# Altium PCB cybd18SV1.2.3F.PcbDoc
Units mil, origin at the board's own origin, x right, y up, seen from the top; angles counter-clockwise.
Board outline 2105.38 x 2630.03 mil, 2 copper layers (Top Layer, Bottom Layer); 74 components, 61 nets, 284 pads, 43 vias.
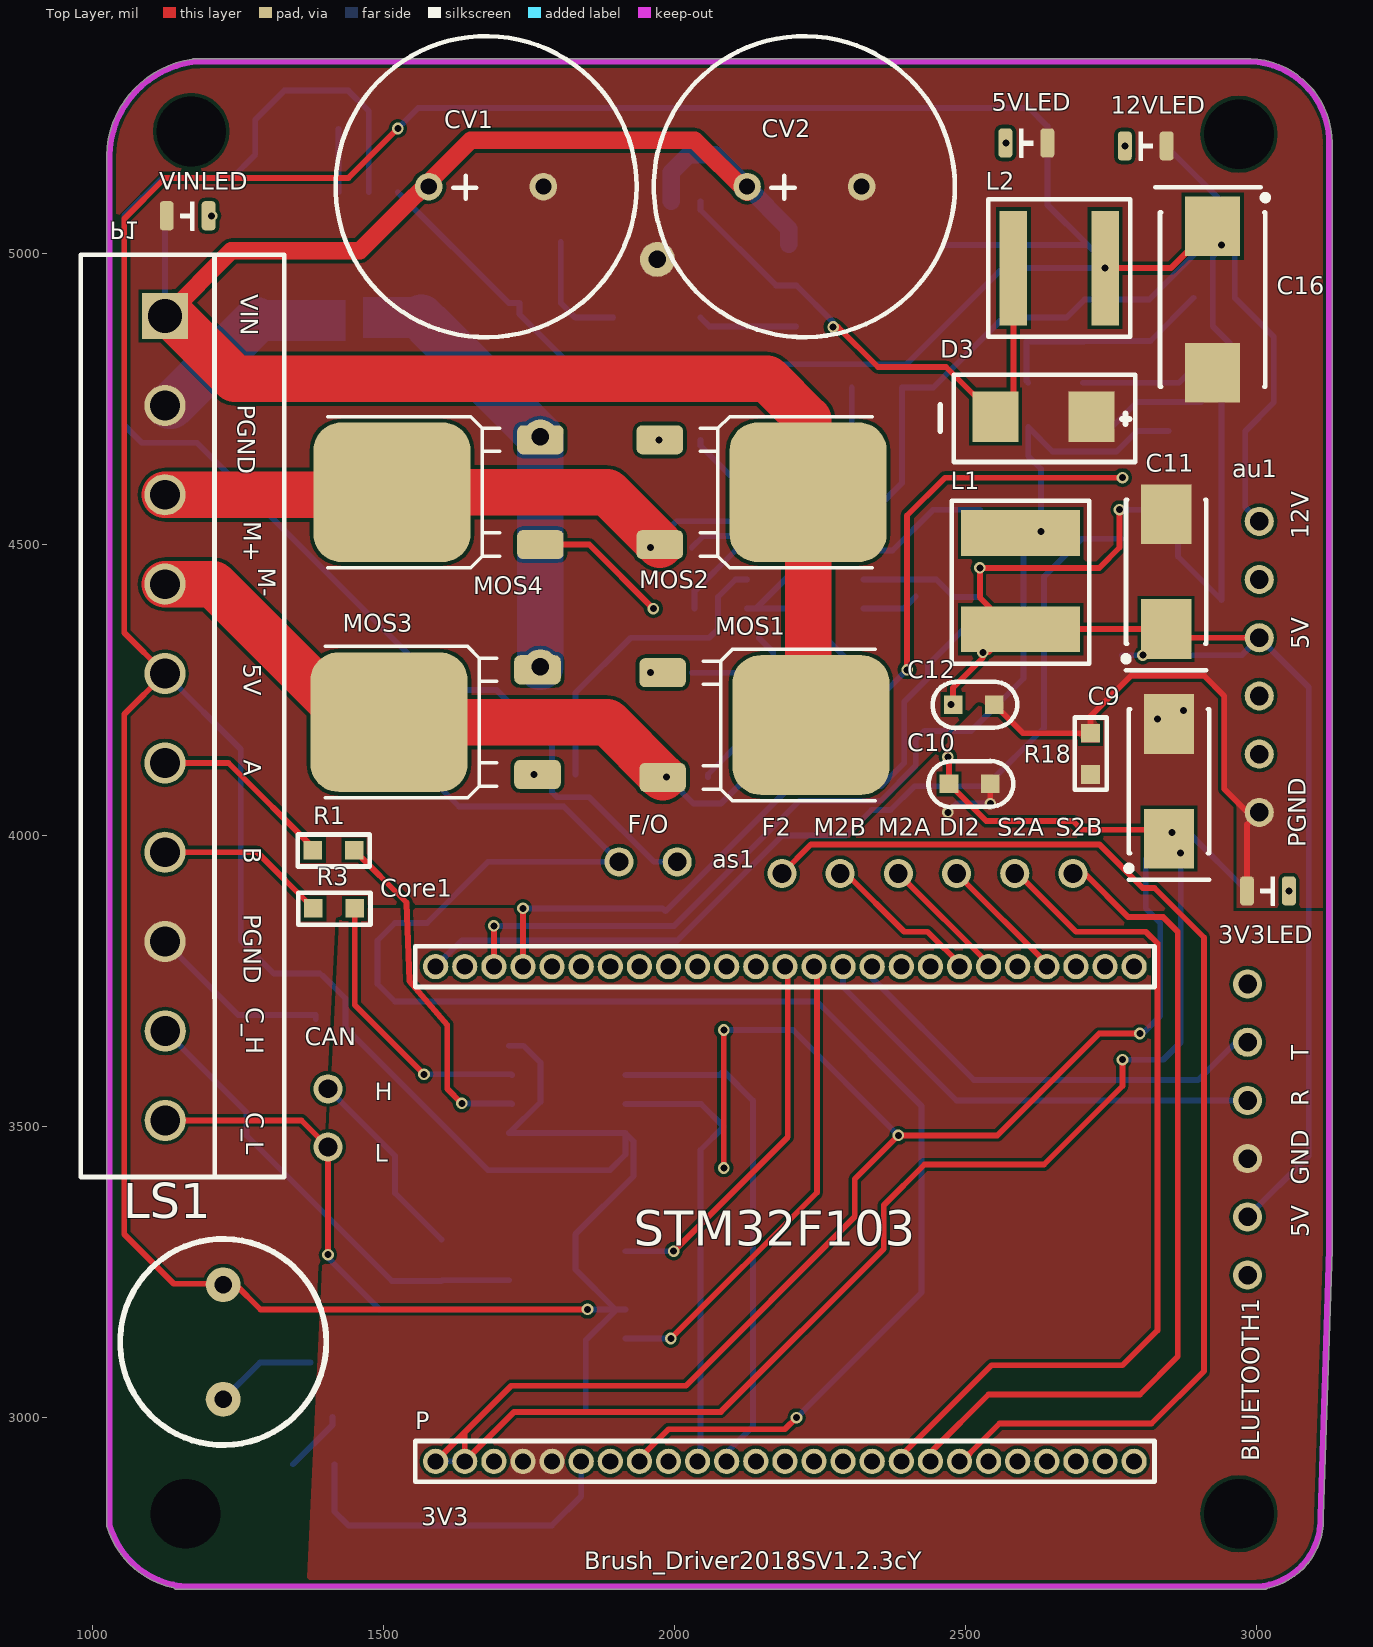
[diagram p0: Top Layer view]
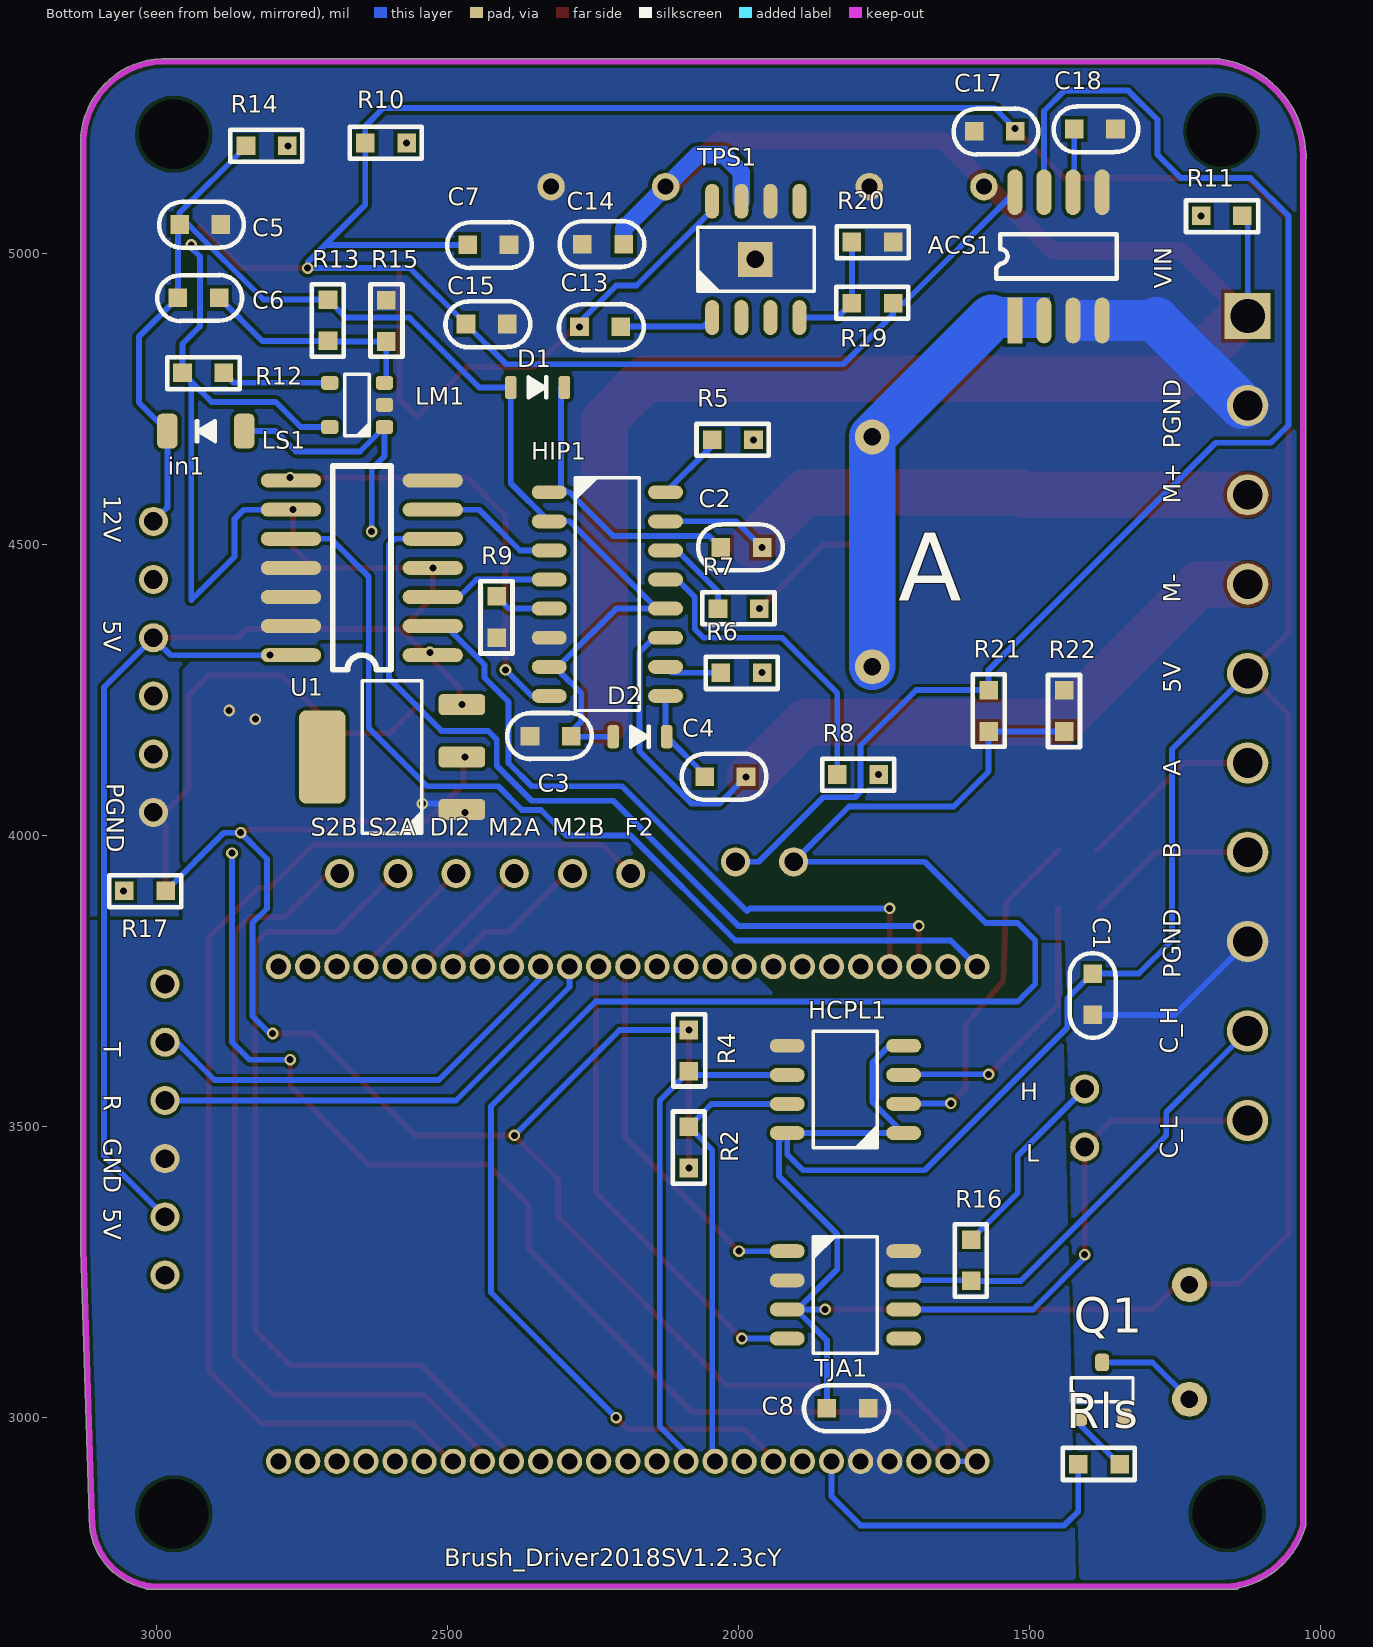
[diagram p1: Bottom Layer view, seen from below]
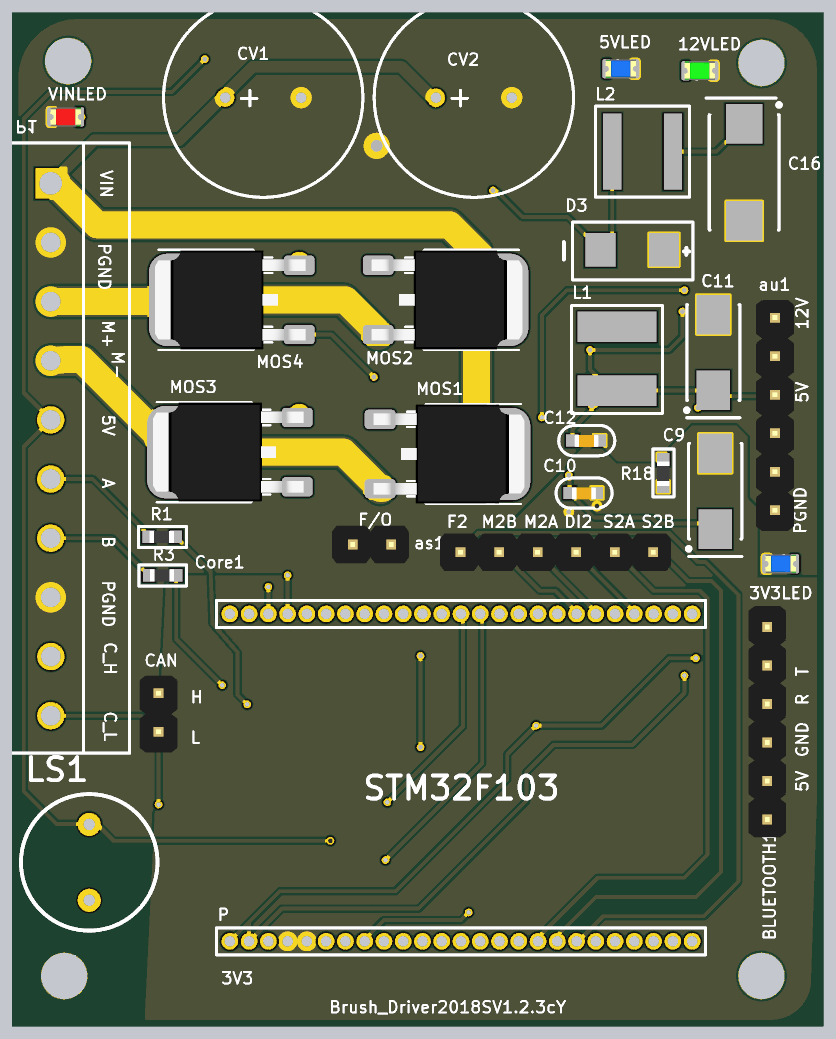
[diagram p2: 3D render of the assembled board from above, using the file's embedded part models]
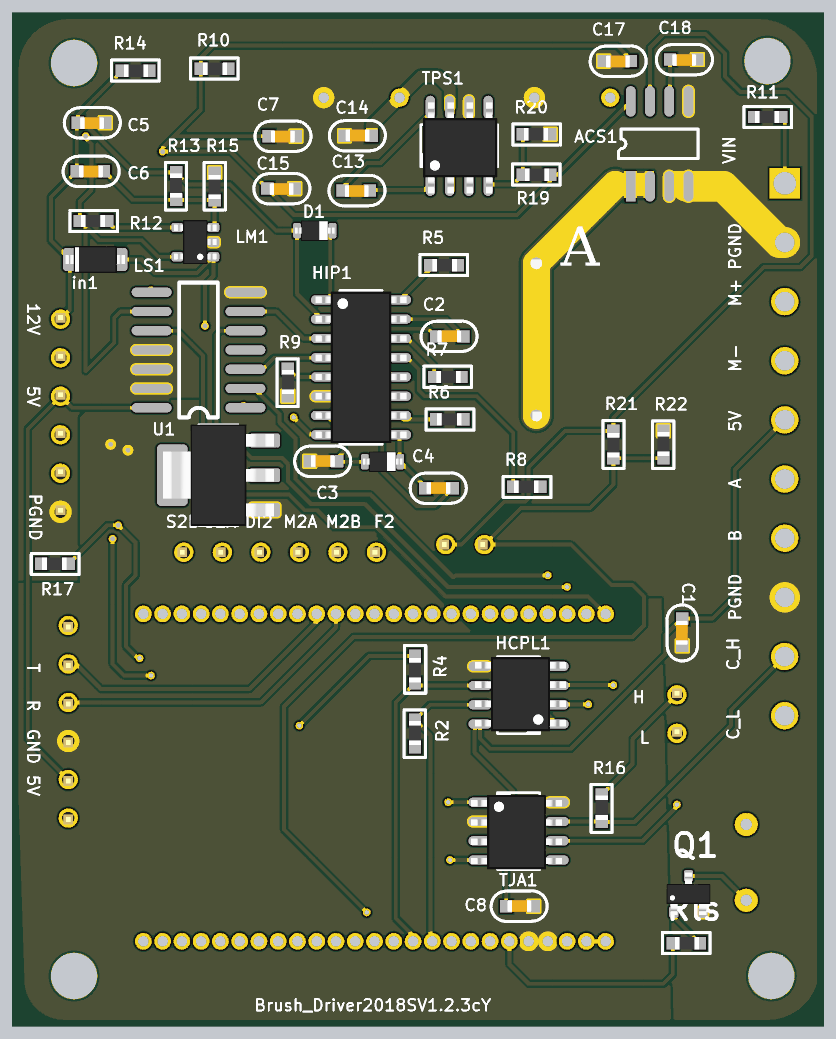
[diagram p3: 3D render of the assembled board from below, using the file's embedded part models]

## Layer stack, top to bottom
Top Solder: solder mask 0.4, Solder Resist, Dk 3.5
Top Layer: signal copper 1.4
Dielectric 1: dielectric 12.6, FR-4, Dk 4.8
Bottom Layer: signal copper 1.4
Bottom Solder: solder mask 0.4, Solder Resist, Dk 3.5

## Board outline
1140.51,2707.77 cw(c1169.72,2855.36) 1025.18,2813.61 cw(c1030,2815) 1024.98,2815 1024.98,5154.85 cw(c1195,5165) 1171.62,5333.71 cw(c1175,5330) 1175,5335.02 2990,5335.02 cw(c2990,5330) 2990.18,5335.01 cw(c2985,5190) 3130.1,5190 cw(c2985,5190) 3130.01,5184.91 3130.01,3290 cw(c3125,3290) 3130.01,3289.82 3130.01,3289.84 3130.01,3289.82 3115.02,2830.03 cw(c2995,2825) 3115.12,2825 cw(c2995,2825) 3019.26,2707.35 cw(c3015,2710) 3015,2704.99 1145,2704.99 cw(c1145,2710)

## Design rules (kind name [scope] priority, off if disabled: settings)
Clearance [All] p1: gap=6 ignorepadtopadclearanceinfootprint=FALSE
PolygonConnect [All] p1: connectstyle=Direct reliefconductorwidth=10 reliefentries=4 polygonreliefangle="90 Angle" airgapwidth=10
RoutingVias [All] p1: holewidth=12 width=20 viastyle="Through Hole" minholewidth=10 minwidth=20 maxholewidth=28 maxwidth=50
SolderMaskExpansion [All] p1: expansion=4
UnRoutedNet [All] p1: checkbadconnections=TRUE
Width [All] p1: maxlimit=100 minlimit=10 preferedwidth=10
29 further rules are at their usual default settings.

## Classes and differential pairs
component class 电流环: ACS1 C17 C18 C? F/O P? R21 R22
component class tps5430_VIN_5V: C13 C14 C15 C16 D3 L2 LS1 Q1 R19 R20 Rls TPS1
component class tlv117_5_3.3: 3V3LED C9 C10 C11 C12 R17 R18 U1
component class taj1050: C8 CAN P3 R16 TJA1
component class lm27313_5_12: 12VLED C5 C6 C7 in1 L1 LM1 R12 R13 R14 R15
component class HIP4082driver: 5VLED as1 au1 C2 C3 C4 CV1 CV2 D1 D2 HIP1 MOS1 MOS2 MOS3 MOS4 P1 R5 R6 R7 R8 R9 R10 R11 VINLED
component class hcpl0630: C1 HCPL1 R1 R2 R3 R4
component class 74ls08: LS1
component class F103H: BLUETOOTH1

## Components (designator, comment, footprint, x,y, rotation, side; value= is the part's Value field where it differs from the comment)
3V3LED "LED_0805" LED_0805_BLUE 3020,3905 r180 top
5VLED "LED_0805" LED_0805_BLUE 2605,5190 r0 top (schematic designator 1)
12VLED "LED_0805" LED_0805_GREEN 2810,5185 r0 top
ACS1 "ACS712" SOP8ACS712 1525,4885 r90 bottom
as1 "HDR1x6_2.54" HDR1X6_2.54_180 2685,3935 r270 top
au1 "HDR1x6_2.54" HDR1X6_2.54_180 3005,4540 r0 top
BLUETOOTH1 "HDR1x6_2.54" HDR1X6_2.54_180 2985,3245 r180 top
C1 "Cap_0603" CAP_0603 1390,3725 r90 bottom value=0.1uF
C2 "Cap_0603" CAP_0603 1997,4494 r180 bottom value=1uF
C3 "Cap_0603" CAP_0603 2325,4170 r180 bottom value=0.1uF
C4 "Cap_0603" CAP_0603 2025,4100 r180 bottom value=1uF
C5 "Cap_0603" CAP_0603 2922,5051 r0 bottom value=4.7uF
C6 "Cap_0603" CAP_0603 2925,4925 r0 bottom value=220pF
C7 "Cap_0603" CAP_0603 2427,5016 r0 bottom value=2.2uF
C8 "Cap_0603" CAP_0603 1815,3015 r180 bottom value=0.1uF
C9 "Cap_Tan_0805" CAP-TAN-6032/CAPC 2850,3995 r270 top value=100uF
C10 "Cap_0603" CAP_0603 2510,4090 r180 top value=0.1uF
C11 "Cap_Tan_0805" CAP-TAN-6032/CAPC 2845,4355 r270 top value=100uF
C12 "Cap_0603" CAP_0603 2517,4226 r180 top value=0.1uF
C13 "Cap_0603" CAP_0603 2235,4875 r0 bottom value=0.1uF
C14 "Cap_0603" CAP_0603 2235,5015 r180 bottom value=10uF
C15 "Cap_0603" CAP_0603 2430,4880 r0 bottom value=0.1uF
C16 "Cap_Tan_0805" CAP-TAN-7343/CAPD 2925,5046.97 r270 top value=220uF
C17 "Cap_0603" CAP_0603 1557,5211 r0 bottom value=0.1uF
C18 "Cap_0603" CAP_0603 1385,5215 r0 bottom value=1nF
CAN "HDR1x2_2.54" HDR1X2_2.54_180 1405,3565 r0 top (schematic designator CAN1)
Core1 "STM32F103 SMALL" STM32F103Small 2175,3325 r0 top
CV1 "680uF" CAP_ELE_680UF0.7X5MM 1775,5115 r180 top value=*μF
CV2 "680uF" CAP_ELE_680UF0.7X5MM 2321.85,5115 r180 top value=*μF
D1 "Din5819" SOD-323 2345,4770 r180 bottom
D2 "Din5819" SOD-323 2169,4170 r180 bottom
D3 "dio_ss34" dio_ss34 2635,4720 r180 top
F/O "HDR1x2_2.54" HDR1X2_2.54_180 2005,3955 r270 top (schematic designator F/O1)
HCPL1 "HCPL0630" SOP_E150_8 1815,3565 r0 bottom
HIP1 "hip4082" SOP_E150_16 2225,4415 r180 bottom
in1 "SchottkyDiode_SOD123" SOD-123 2915,4695 r0 bottom value=B?
L1 "" indmm5x2_2_2 2595,4441.26 r90 top value=10uH
L2 "Ind_0603" indmm5x1.2x4x5 2661.26,4975 r0 top value=47H
LM1 "LM27313" SOT23-5 2655,4740 r0 bottom
LS1 "Bell" Bell-5.6-0.6-9mm 1225,3130 r270 top
LS1 "74LS08" SOP14 2536.81,4310 r0 bottom
MOS1 "MOSFET_N" TO-252AA 1980,4280 r270 top value=NMOS?
MOS2 "MOSFET_N" TO-252AA 1975,4680 r270 top value=NMOS?
MOS3 "MOSFET_N" TO-252AA 1765,4105 r90 top value=NMOS?
MOS4 "MOSFET_N" TO-252AA 1770,4500 r90 top value=NMOS?
P1 "Header 10" Green_10P 1125,4885.63 r270 top
Q1 "BJT_NPN" SOT23-3 1375,3048 r90 bottom
R1 "Res_0603" RES_0603 1413,3893 r180 top value=500
R2 "Res_0603" RES_0603 2167,3466 r90 bottom value=2k
R3 "Res_0603" RES_0603 1414,3793 r180 top value=500
R4 "Res_0603" RES_0603 2003,3629 r270 bottom value=2k
R5 "Res_0603" RES_0603 2008,4762 r180 bottom value=10K
R6 "Res_0603" RES_0603 1996,4198 r0 bottom value=10K
R7 "Res_0603" RES_0603 1998,4472 r180 bottom value=10K
R8 "Res_0603" RES_0603 1796,4023 r0 bottom value=10K
R9 "Res_0603" RES_0603 2497,4377 r90 bottom value=10K
R10 "Res_0603" RES_0603 2604,5272 r180 bottom value=10K
R11 "Res_0603" RES_0603 1171,4983 r0 bottom value=10K
R12 "Res_0603" RES_0603 2921,4713 r0 bottom value=10K
R13 "Res_0603" RES_0603 2787,4887 r90 bottom value=10K
R14 "Res_0603" RES_0603 2809,5267 r180 bottom value=10K
R15 "Res_0603" RES_0603 2523,4883 r270 bottom value=1K
R16 "Res_0603" RES_0603 1682,3272 r90 bottom value=120
R17 "Res_0603" RES_0603 3021,3823 r0 bottom value=10K
R18 "Res_0603" RES_0603 2797,4139 r270 top value=0
R19 "Res_0603" RES_0603 1768,4997 r180 bottom value=10K
R20 "Res_0603" RES_0603 1771,4938 r0 bottom value=3.3K
R21 "Res_0603" RES_0603 1488,4213 r270 bottom value=10K
R22 "Res_0603" RES_0603 1522,4216 r90 bottom value=10K
Rls "Res_0603" RES_0603 1379,3002 r180 bottom value=1K (schematic designator R2018)
TJA1 "TJA1050" SOP_E150_8 1817,3210 r180 bottom
TPS1 "TPS5430" SOP_E150_9 1970,4990 r90 bottom
U1 "tlv1117-3.3" SOT223-3 2595,4135 r90 bottom
VINLED "LED_0805" LED_0805_RED 1164,5065 r180 top (schematic designator VINLED1)

## Footprints (in the part's own frame and the unit in brackets; to place one, negate y for a bottom-side part, rotate by r counter-clockwise, add the part's x,y. Pads: shape width x height; smd on the part's side, far side on the other; paste and mask are expansions set on the pad)
Bell-5.6-0.6-9mm [mil]
  round 60 hole 30: 1(-98.43,0) 2(98.43,0)
  silkscreen extent -177,-177 177,177
CAP-TAN-6032/CAPC [mm]
  rect 2.6x2.2 smd: 1(0,0) 2(-5,0)
  silkscreen extent -5.65,-1.87 1.8,1.75
CAP-TAN-7343/CAPD [mm]
  rect 2.6x2.4 smd: 1(0,0) 2(6.4,0)
  silkscreen extent -1.7,-2.5 7,2.43
CAP_0603 [mil]
  rect 32x32 smd: 1(-33,1) 2(38,1)
  silkscreen extent -72,-38 73,41, body extent -30,-14 33,18, height 31
CAP_ELE_680UF0.7X5MM [mm]
  round 1.2 hole 0.7: 1(5,0) 2(0,0)
  silkscreen extent -4.07,-6.57 9.07,6.57
dio_ss34 [mm]
  rect 2x2.2 smd: 1(-2.083,0) 2(2.108,0)
  silkscreen extent -3.99,-1.83 4.52,1.98
Green_10P [mm]
  rect 2x2 hole 1.5: 1(-0.18,0)
  round 1.8 hole 1.3: 2(3.72,0) 3(7.62,0) 4(11.52,0) 5(15.42,0) 6(19.32,0) 7(23.22,0) 8(27.12,0) 9(31.025,0.01) 10(34.925,0.01)
  silkscreen extent -2.85,-3.68 37.39,5.21
HDR1X2_2.54_180 [mil]
  round 50 hole 32: 1(0,0) 2(0,-100)
  body extent -49,-150 49,50, height 323
HDR1X6_2.54_180 [mil]
  round 50 hole 32: 1(0,0) 2(0,-100) 3(0,-200) 4(0,-300) 5(0,-400) 6(0,-500)
  body extent -49,-550 49,50, height 323
indmm5x1.2x4x5 [mm]
  rect 1.2x5 smd: 1(-2,0) 2(2,0)
  silkscreen extent -3.1,-3 3.1,3
indmm5x2_2_2 [mm]
  rect 2x5.2 smd: 1(-2.2,0) 2(2,0)
  silkscreen extent -3.7,-3 3.4,3
LED_0805_BLUE [mil]
  rrect50% 24x50 smd: 1(-36,0) 2(36,0)
  silkscreen extent -12,-24 12,24, body extent -40,-25 40,25, height 43
LED_0805_GREEN [mil]
  rrect50% 24x50 smd: 1(-36,0) 2(36,0)
  silkscreen extent -12,-24 12,24, body extent -40,-25 40,25, height 43
LED_0805_RED [mil]
  rrect50% 24x50 smd: 1(-36,0) 2(36,0)
  silkscreen extent -12,-24 12,24, body extent -40,-25 40,25, height 43
RES_0603 [mil]
  rect 32x32 smd: 1(-37,-82) 2(34,-82)
  silkscreen extent -64,-109 60,-54, body extent -31,-98 31,-66, height 18
SOD-123 [mil]
  rrect50% 35x60 smd: 1(-66,0) 2(66,0)
  silkscreen extent -16,-18 16,18, body extent -77,-35 77,35, height 46
SOD-323 [mil]
  rrect50% 20x40 smd: 1(-46,0) 2(46,0)
  silkscreen extent -16,-18 16,18, body extent -51,-27 51,27, height 43
SOP8ACS712 [mm]
  rect 2x0.65 smd: 1(0,0)
  oval 2x0.65 smd: 2(0,-1.27) 3(0,-2.54) 4(0,-3.81) 5(5.6,-3.81) 6(5.6,-2.54) 7(5.6,-1.27) 8(5.6,0)
  silkscreen extent 1.84,-4.44 3.77,0.81
SOP14 [mil]
  oval 103.62x24 smd: 1(-11.81,0) 2(-11.81,-50) 3(-11.81,-100) 4(-11.81,-150) 5(-11.81,-200) 6(-11.81,-250) 7(-11.81,-300) 8(231.81,-300) 9(231.81,-250) 10(231.81,-200) 11(231.81,-150) 12(231.81,-100) 13(231.81,-50) 14(231.81,0)
  silkscreen extent 60,-325 160,25
SOP_E150_8 [mil]
  oval 60x24 smd: 1(-99,76) 2(-99,26) 3(-99,-24) 4(-99,-74) 5(101,-74) 6(101,-24) 7(101,26) 8(101,76)
  silkscreen extent -54,-99 56,101, body extent -122,-98 114,95, height 69
SOP_E150_9 [mil]
  oval 60x24 smd: 1(-100,75) 2(-100,25) 3(-100,-25) 4(-100,-75) 5(100,-75) 6(100,-25) 7(100,25) 8(100,75)
  rect 60x60 smd: 9(0,1)
  silkscreen extent -55,-100 55,100, body extent -123,-99 113,94, height 69
SOP_E150_16 [mil]
  oval 60x24 smd: 1(-100,175) 2(-100,125) 3(-100,75) 4(-100,25) 5(-100,-25) 6(-100,-75) 7(-100,-125) 8(-100,-175) 9(100,-175) 10(100,-125) 11(100,-75) 12(100,-25) 13(100,25) 14(100,75) 15(100,125) 16(100,175)
  silkscreen extent -55,-200 55,200, body extent -118,-197 118,197, height 69
SOT23-3 [mil]
  rrect50% 30x24 smd: 1(-47,38) 2(-47,-38) 3(47,0)
  silkscreen extent -21,-53 21,53, body extent -55,-57 55,57, height 51
SOT23-5 [mil]
  rrect50% 30x24 smd: 1(-47,38) 2(-47,0) 3(-47,-38) 4(47,-38) 5(47,38)
  silkscreen extent -21,-53 21,53, body extent -55,-57 55,57, height 57
SOT223-3 [mil]
  rrect40% 36x80 smd: 1(-90.16,-120) 2(0,-120) 3(90.16,-120)
  rrect30% 160x80 smd: 4(0,120)
  silkscreen extent -131,-51 131,51, body extent -132,-144 132,144, height 71
STM32F103Small [mm]
  round 1.1 hole 0.7: 1(-14.859,-10.16) 2(-13.589,-10.16) 3(-12.319,-10.16) 4(-11.049,-10.16) 5(-9.779,-10.16) 6(-8.509,-10.16) 7(-7.239,-10.16) 8(-5.969,-10.16) 9(-4.699,-10.16) 10(-3.429,-10.16) 11(-2.159,-10.16) 12(-0.889,-10.16) 13(0.381,-10.16) 14(1.651,-10.16) 15(2.921,-10.16) 16(4.191,-10.16) 17(5.461,-10.16) 18(6.731,-10.16) 19(8.001,-10.16) 20(9.271,-10.16) 21(10.541,-10.16) 22(11.811,-10.16) 23(13.081,-10.16) 24(14.351,-10.16) 25(15.621,-10.16) 26(-14.859,11.43) 27(-13.589,11.43) 28(-12.319,11.43) 29(-11.049,11.43) 30(-9.779,11.43) 31(-8.509,11.43) 32(-7.239,11.43) 33(-5.969,11.43) 34(-4.699,11.43) 35(-3.429,11.43) 36(-2.159,11.43) 37(-0.889,11.43) 38(0.381,11.43) 39(1.651,11.43) 40(2.921,11.43) 41(4.191,11.43) 42(5.461,11.43) 43(6.731,11.43) 44(8.001,11.43) 45(9.271,11.43) 46(10.541,11.43) 47(11.811,11.43) 48(13.081,11.43) 49(14.351,11.43) 50(15.621,11.43)
  silkscreen extent -15.75,-11.05 16.51,12.32
TO-252AA [mil]
  rrect40% 50x80 smd: 1(0,0) 3(180,0)
  rrect40% 240x270 smd: 4(90,255)
  silkscreen extent -40,70 220,365, body extent -39,-17 219,374, height 91

## Part data
3V3LED 5VLED 12VLED VINLED: library part LED_0603, "LED"
ACS1: "Sensor Current"
as1 au1 BLUETOOTH1 CAN F/O: "Header"
C1 C2 C3 C4 C5 C6 C7 C8 C9 C10 C11 C12 C13 C14 C15 C16 C17 C18: "Capacitor"
CV1 CV2: library part CAP-ELE, "电解电容", LatestRevisionDate=17-Jul-2002, LatestRevisionNote="Re-released for DXP Platform.", PackageDescription="Polarized Capacitor (Radial); 2 Leads", PackageReference=RB7.6-15, Published=8-Jun-2000, Publisher="Altium Limited"
D1 D2: library part Diode, "Diode"
in1: "Diode"
L1: library part Ind_0603, "Inductor"
L2: "Inductor"
LS1: "Electrical Bell", LatestRevisionDate=17-Jul-2002, LatestRevisionNote="Re-released for DXP Platform.", PackageReference=PIN2, Published=24-Mar-1999, Publisher="Altium Limited"
MOS1 MOS2 MOS3 MOS4: "MOSFET"
P1: "Header, 10-Pin", LatestRevisionDate=17-Jul-2002, LatestRevisionNote="Re-released for DXP Platform.", Publisher="Altium Limited"
Q1: "Transistor"
R1 R2 R3 R4 R5 R6 R7 R8 R9 R10 R11 R12 R13 R14 R15 R16 R17 R18 R19 R20 R21 R22 Rls: "Resistor"
TJA1: "CAN总线收发器"
U1: library part LM1117IMP-5.0, "800mA Low-Dropout Linear Regulator", DigiKeyPartNumber=LM1117IMP-5.0CT-ND, Manufacturer="National Semiconductor", PackageTopMarking=XYTT*N06B, PowerWise=N, Code_IPC=SOT223-4, Code_JEDEC=TO-261-AA, ComponentLink1Description="LM1117 Datasheet", ComponentLink1URL=http://www.national.com/ds/LM/LM1117.pdf, ComponentLink2Description="LM1117 Web Page", ComponentLink2URL=http://www.national.com/pf/LM/LM1117.html, ComponentLink3Description="MP04A Package Page", ComponentLink3URL=http://www.national.com/packaging/folders/mp04a.html, CompType="LDO IC", DatasheetVersion=Apr-2006, PackageDescription="Molded SOT-223, 6.50 x 3.56 x 1.6mm Body, 4 Lead, 2.3mm Pitch", PackageReference=MP04A, PackageVersion="revB, Apr-2003", PartNumber=LM1117IMP-5.0, PinCount=4, Published=4-Dec-2008, Publisher="Altium Limited", RoHS=O

## Free pads (board coordinates)
  round 60 hole 30: 18(1770,4685) 19(1770,4290) 24(1971,4990)
  round 60 hole 120: 20(1170,5210) 21(2970,5205) 22(2970,2835) 23(1160,2835)

## Via types
v1: diameter 20, hole 12, Top Layer to Bottom Layer, 43 vias

## Nets (pads, with @x,y where several pads share a name; then routed paths per layer and width w, separated by ;. In a path a pad name is that pad's centre, name@x,y a point inside that pad or via, vN(x,y) a via of type N, cw(c..) or ccw(c..) an arc to the next point about the centre after c; other vN are vias at no path point)
3V3: C9.1 C10.2 Core1.1 Core1.2 R2.1 R4.1 R17.1 U1.2 | length 5207.4
  Top Layer w10: Core1.1 1640,2975 ; v1(2085,3429) v1(2085,3666) ; v1(2470,4135) 2472,4133 C10.2 2536,4025 2685,4025 2700,4010 C9.1@2850,4010 ; v1(2770,3615) 2770,3570 2635,3435 2430,3435 2360,3365 2360,3290 2080,3010 1725,3010 Core1.2 1640,2975 ; v1(2800,3660) 2730,3660 2555,3485 v1(2385,3485) 2310,3410 2310,3345 2020,3055 1720,3055 1640,2975
  Bottom Layer w10: Core1.1@1595,2925 Core1.2 Core1.2@1645,2925 ; v1(2085,3666) 2204,3666 v1(2385,3485) ; v1(2770,3615) 2840,3615 2870,3645 v1(2870,3970) ; v1(2800,3660) 2805,3660 2835,3690 2835,3850 2810,3875 2810,3960 v1(2855,4005) 2884,4005 R17.1
5V: ACS1.8 au1.3 BLUETOOTH1.2 C1.2 C7.2 C8.1 C11.1 C12.2 C15.2 C16.1 C17.1 HCPL1.1 HCPL1.4 HCPL1.8 L1.1 L2.2 LM1.5 LS1.1 LS1.4 LS1.9 LS1.14 P1.5 R10.1 R12.2 R19.2 TJA1.3 U1.3 | length 12503.5
  Top Layer w10: v1(1525,5215) 1440,5130 1125,5130 1055,5060 1055,4348.54 P1.5 1055,4208.54 1055,3315 1140,3230 1245,3230 1289,3186 v1(1851,3186) ; C12.2 2479,4254 2530,4305 v1(2530,4315) 2540,4315 L1.1@2579.65,4354.65 ; v1(2740,4975) 2853.03,4975 C16.1 ; v1(2765,4560) 2765,4495 2730,4460 v1(2525,4460) 2525,4409.29 L1.1@2579.65,4354.65 ; au1.3 2860,4340 C11.1 2595.35,4355 L1.1 L1.1@2579.65,4354.65
  Bottom Layer w10: P1.5 1255,4148.54 1255,3820 1312,3763 C1.2 ; C1.2@1395,3760 1435,3720 1435,3670 1680,3425 1889,3425 1916,3452 HCPL1.8 ; ACS1.8 1715.47,4915 R19.2 1734,4896 1820,4810 2399,4810 C15.2 2564,4975 v1(2740,4975) 2740,4985 2710,5015 ; v1(1525,5215) 1560,5250 2610,5250 2641,5219 R10.1 2641,5084 2710,5015 ; HCPL1.1 HCPL1.1@1716.53,3489 ; HCPL1.4 1741,3639 1770,3610 1770,3542.47 HCPL1.1@1716.53,3489 ; C8.1 1848,3133 TJA1.3@1901,3186 ; v1(1851,3186) TJA1.3@1899,3186 ; TJA1.3 TJA1.3@1901,3186 ; C7.2 2710,5015 ; LM1.5 2752,4702 2795,4745 2905,4745 R12.2@2940,4780 ; LS1.14 v1(2805,4310) 2975,4310 au1.3 3090,4255 3090,3450 BLUETOOTH1.2 ; LS1.9 2850,4560 2865.47,4544.53 2865.47,4479.53 2940,4405 R12.2@2940,4780 ; v1(2940,5015) 2940,5010 2925,4995 2925,4875 2955,4845 R12.2 R12.2@2940,4780 ; HCPL1.1@1716.53,3489 HCPL1.8 ; TJA1.3@1899,3186 1830,3255 1830,3315 1930,3415 1930,3475 HCPL1.8 ; TJA1.3@1899,3186 TJA1.3@1901,3186
  other v1: 2475,4225.16
12V: au1.1 C3.2 C5.2 C6.2 D1.1 D2.1 HIP1.2 HIP1.7 HIP1.12 in1.2 R13.2 R14.1 | length 2359.6
  Bottom Layer w10: HIP1.12 HIP1.12@2140,4390 ; D2.1 2286,4170 2286,4180 2270,4196 2270,4245 HIP1.7@2305,4280 ; HIP1.7@2302.5,4297.5 2210,4390 HIP1.12@2140,4390 ; R14.1@2845,5185 2960,5070 C5.2 ; au1.1 2981,4564 in1.2 3030,4744 3030,4857 C6.2 2963,5047 C5.2 ; HIP1.12@2140,4390 2290,4540 HIP1.2 2325.53,4540 2391,4605.47 D1.1 2445,4770 2565,4890 2674,4890 R13.2 2816,4921 2945,5050 C5.2
CAN_H: P1.9 R16.1 TJA1.7 | length 792
  Bottom Layer w10: P1.9 1265,3524.6 1265,3485 1515,3235 R16.1 1601,3236 TJA1.7
CAN_L: CAN.2 P1.10 TJA1.6 | length 843.4
  Top Layer w10: P1.10 1359.35,3510.65 CAN.2 v1(1405,3280)
  Bottom Layer w10: v1(1405,3280) 1400,3280 1494,3186 TJA1.6
CAN_RX: Core1.39 TJA1.4 | length 821
  Top Layer w10: v1(1994,3136) 2245,3387 Core1.39@2245,3775
  Bottom Layer w10: TJA1.4 v1(1994,3136)
CAN_TX: Core1.38 TJA1.1 | length 653.2
  Top Layer w10: v1(1999,3286) 2195,3482 Core1.38@2195,3775
  Bottom Layer w10: TJA1.1 v1(1999,3286)
DIS: Core1.26 LS1.10 | length 1614.2
  Bottom Layer w10: Core1.26@1605,3790 1635,3820 2005,3820 2185,4000 2295,4000 2339,4044 2371.63,4044 2412.63,4085 2535,4085 2635,4185 2635,4445 2700,4510 LS1.10
DIS2: as1.3 Core1.47 | length 226.3
  Top Layer w10: as1.3 Core1.47@2645,3775
DISIN: HIP1.8 LS1.8 | length 755.6
  Top Layer w10: v1(2400,4285) 2400,4550 2465,4615 v1(2770,4615)
  Bottom Layer w10: HIP1.8 2355,4240 v1(2400,4285)
GND: BLUETOOTH1.3 C8.2 C9.2 C10.1 Core1.4 Core1.5 HCPL1.5 R18.2 TJA1.2 TJA1.8 U1.1 | length 106.2
  Top Layer w10: v1(2543,4055) C10.1
  Bottom Layer w10: U1.1 2485.16,4055 v1(2543,4055)
  other v1: 2470,4040 2830,4200 2875,4215
MOT+: C2.2 HIP1.15 MOS2.3 MOS4.4 P1.3 | length 1073.7
  Top Layer w10: MOS4.4@1510.63,4585.63 MOS4.4
  Top Layer w80: P1.3 MOS4.4@1510.63,4585.63 ; MOS4.4 1885,4590 MOS2.3
  Bottom Layer w10: v1(1959,4495) 2004,4540 HIP1.15
MOT-: C4.2 HIP1.11 MOS1.3 MOS3.4 P1.4 | length 1437.2
  Top Layer w80: P1.4 1207.91,4432.09 1445,4195 MOS3.4 1885,4195 MOS1.3
  Bottom Layer w10: v1(1987,4101) 2033,4055 2080,4055 2170,4145 2170,4315 HIP1.11@2145,4340
Net3V3LED_1: 3V3LED.1 R17.2
  other v1: 3056,3905
Net5VLED_1: 5VLED.1 R10.2
  other v1: 2570,5190
Net12VLED_1: 12VLED.1 R14.2
  other v1: 2774,5185
NetACS1_6: ACS1.6 C18.2 | length 108.5
  Bottom Layer w10: ACS1.6@1423,5105.47 C18.2
NetC2_1: C2.1 D1.2 HIP1.1 | length 518.5
  Bottom Layer w10: C2.1 2050,4515 2215,4515 2290,4590 HIP1.1@2295,4590 ; D1.2@2305,4770 2305,4600 HIP1.1@2295,4590 ; HIP1.1 HIP1.1@2295,4590
NetC4_1: C4.1 D2.2 HIP1.9 | length 166.8
  Bottom Layer w10: C4.1 2058,4105 D2.2 2125,4172 HIP1.9
NetC6_1: C6.1 LM1.3 R13.1 R15.2 | length 390.3
  Bottom Layer w10: LM1.3 2605,4781 R15.2 2704,4849 R13.1 2818,4850 C6.1
NetC13_1: C13.1 TPS1.1 | length 170.2
  Bottom Layer w10: TPS1.1 2060,4875 C13.1@2209,4875
NetC13_2: C13.2 D3.2 L2.1 TPS1.8 | length 941.4
  Top Layer w10: v1(2273,4874) 2281,4874 2350,4805 2467,4805 D3.2 2582.52,4750.52 L2.1
  Bottom Layer w10: TPS1.8 2045,5075 2175,4945 2210,4945 2273,4882 v1(2273,4874)
NetCAN1_1: CAN.1 R16.2 | length 339.8
  Bottom Layer w10: CAN.1 1520,3450 1520,3386 R16.2
NetHCPL1_2: HCPL1.2 R1.1 | length 593.4
  Top Layer w10: R1.1 1540,3885 1545,3750 1610,3675 1610,3565 v1(1635,3540)
  Bottom Layer w10: v1(1635,3540) 1720,3540 HCPL1.2@1721,3539
NetHCPL1_3: HCPL1.3 R3.1 | length 485.7
  Top Layer w10: R3.1 1451,3709 v1(1570,3590)
  Bottom Layer w10: v1(1570,3590) 1720,3590 HCPL1.3@1721,3589
NetHIP1_5: HIP1.5 R9.2 | length 98.7
  Bottom Layer w10: HIP1.5 2394,4390 R9.2
NetHIP1_10: HIP1.10 R6.2 | length 99.1
  Bottom Layer w10: R6.2 2115,4280 HIP1.10
NetHIP1_13: HIP1.13 R8.2 | length 548
  Bottom Layer w10: R8.2 1830,4245 1925,4340 2060,4340 2075,4355 2075,4410 2105,4440 HIP1.13
NetHIP1_14: HIP1.14 R7.1 | length 149
  Bottom Layer w10: R7.1 2035,4420 2105,4490 HIP1.14
NetHIP1_16: HIP1.16 R5.1 | length 123.1
  Bottom Layer w10: R5.1 2045,4670 HIP1.16
Netin1_1: in1.1 L1.2 LM1.1 | length 464
  Bottom Layer w10: v1@2630,4520 v1(2630,4522.5) 2630,4630 2608,4652 LM1.1 2650,4660 2760,4660 2795,4695 in1.1
NetLM1_4: LM1.4 R12.1 | length 189
  Bottom Layer w10: LM1.4 2867,4778 R12.1
NetLS1_2: LS1.2@1225,3031.57 Q1.3 | length 176.3
  Bottom Layer w10: LS1.2@1225,3031.57 1288.43,3095 Q1.3
NetMOS1_1: MOS1.1 R6.1
  other v1: 1959,4280
NetMOS2_1: MOS2.1 R5.2
  other v1: 1974,4680
NetMOS3_1: MOS3.1 R8.1
  other v1: 1759,4105
NetMOS4_1: MOS4.1 R7.2 | length 239.6
  Top Layer w10: MOS4.1 1854,4500 v1(1964,4390)
NetQ1_1: Q1.1 Rls.2 | length 109.2
  Bottom Layer w10: Rls.2 1413,2988 Q1.1
NetR11_2: R11.2 VINLED.1
  other v1: 1205,5065
NetR19_1: R19.1 R20.2 TPS1.4 | length 205.4
  Bottom Layer w10: R20.2 R19.1 1830,4890 TPS1.4
PGND: 3V3LED.2 5VLED.2 12VLED.2 ACS1.3 ACS1.4 ACS1.5 au1.6 C1.1 C3.1 C5.1 C7.1 C11.2 C12.1 C14.1 C15.1 C16.2 C17.2 C18.1 CV1.2 CV2.2 D3.1 HIP1.6 LM1.2 LS1.7 LS1.11 LS1.12 LS1.13 P1.2 P1.8 pad.24 Q1.2 R9.1 R15.1 R18.1 R20.1 R22.2 TPS1.6 TPS1.9 VINLED.2 | length 1395.2
  Top Layer w10: C12.1 2599,4176 R18.1 2715,4205 2785,4275 2910,4275 2945,4240 2945,4080 2985,4040 au1.6 2984,4019 3V3LED.2
  Bottom Layer w10: P1.8 1250.91,3692 1384,3692 C1.1@1384,3685
  Bottom Layer w80: P1.2@1133.24,4738.63 1135,4738.61 1134.96,4738.53 1281.43,4885
PWM2A: as1.4 Core1.45 | length 226.3
  Top Layer w10: as1.4 Core1.45@2545,3775
PWM2B: as1.5 Core1.44 | length 276.3
  Top Layer w10: as1.5 2295,3935 2395,3835 2435,3835 Core1.44@2495,3775
PWMA: Core1.29 LS1.2@2525,4360 | length 1166.7
  Top Layer w10: v1(1740,3875) 1740,3780 Core1.29@1745,3775
  Bottom Layer w10: v1(1740,3875) 1980,3875 1985,3870 2200,4085 2355,4085 2395,4125 2395,4230 2436.17,4271.17 2436.17,4293.51 2502.66,4360 LS1.2@2525,4360
PWMAIN: HIP1.4 LS1.3 | length 212.4
  Bottom Layer w10: HIP1.4 2450,4440 2480,4410 LS1.3
PWMB: Core1.28 LS1.5 | length 1493.6
  Top Layer w10: v1(1690,3845) 1690,3780 Core1.28@1695,3775
  Bottom Layer w10: v1(1690,3845) 2000,3845 2215,4060 2355,4060 2415,4120 2415,4165 2430,4180 2510,4180 2600,4270 2600,4500 2590,4510 LS1.5
PWMBIN: HIP1.3 LS1.6 | length 229
  Bottom Layer w10: HIP1.3 2375,4490 2445,4560 LS1.6
RING: Core1.6 Rls.1 | length 595.7
  Bottom Layer w10: Rls.1 1416,2839 1440,2815 1790,2815 1840,2865 Core1.6
RXD: BLUETOOTH1.4 Core1.40 | length 830.8
  Bottom Layer w10: Core1.40 2290,3740 2485,3545 BLUETOOTH1.4 BLUETOOTH1.4@3005,3545
S_A: P1.6 R1.2 | length 321.1
  Top Layer w10: P1.6 1234,4125 R1.2@1384,3975
S_B: P1.7 R3.2 | length 295
  Top Layer w10: P1.7 1283.54,3971.46 R3.2
SPEED2_A: as1.2 Core1.17 | length 1496.7
  Top Layer w10: Core1.17@2395,2925 2395,2940 2545,3090 2770,3090 2830,3150 2830,3815 2810,3835 2690,3835 2590,3935 as1.2
SPEED2_B: as1.1 Core1.18 | length 1457.7
  Top Layer w10: Core1.18@2445,2925 2445,2945 2540,3040 2800,3040 2865,3105 2865,3835 2840,3860 2780,3860 2705,3935 as1.1
SPEED_A: Core1.10 HCPL1.7 R2.2 | length 776.7
  Bottom Layer w10: HCPL1.7 2046,3539 R2.2 2045,3460 Core1.10@2045,2925
SPEED_B: Core1.11 HCPL1.6 R4.2 | length 878.8
  Bottom Layer w10: HCPL1.6 2079,3589 R4.2 2135,3545 2135,2985 2095,2945 Core1.11@2095,2925
TXD: BLUETOOTH1.5 Core1.41 | length 764.4
  Bottom Layer w10: Core1.41 2340,3755 2515,3580 2900,3580 2965,3645 BLUETOOTH1.5
VI: ACS1.1 ACS1.2 MOS3.3 MOS4.3 pad.18 pad.19 | length 796.8
  Bottom Layer w20: ACS1.2 ACS1.1 1585,4870
  Bottom Layer w80: 1565,4890 1585,4870 pad.18 pad.19
VIF: Core1.8 F/O.2 R21.2 R22.1 | length 3092.1
  Top Layer w10: Core1.8@1945,2925 1945,2935 1990,2980 2190,2980 v1(2210,3000)
  Bottom Layer w10: R22.1 R21.2 1570,4110 1630,4050 1810,4050 F/O.2 1680,3955 1575,3850 1520,3850 1490,3820 1490,3745 1520,3715 2245,3715 2425,3535 2425,3215 v1(2210,3000)
VIF2: as1.6 Core1.19 | length 2036.9
  Top Layer w10: as1.6 2235,3985 2730,3985 2805,3910 2825,3910 2910,3825 2910,3080 2820,2990 2558.82,2990 2507.35,2938.53 2507.35,2937.35 Core1.19@2495,2925
VIN: C14.2 CV1.1 CV2.1 MOS1.4 MOS2.4 P1.1 R11.1 TPS1.7 | length 3386.5
  Top Layer w10: P1.1 1126.76,4892.72 P1.1@1137.28,4892.72 ; MOS1.4@2230,4195 MOS1.4
  Top Layer w30: P1.1@1126.76,4892.72 1239.04,5005 1460,5005 1650,5195 2035,5195 CV2.1@2125,5105
  Top Layer w80: P1.1@1137.28,4892.72 1245,4785 2160,4785 2230,4715 MOS2.4 MOS1.4@2230,4195
  Bottom Layer w10: P1.1 1125,5056 R11.1
  Bottom Layer w30: TPS1.7 1995,5140 2025,5170 2070,5170 CV2.1 2197,5043 C14.2
VIO: ACS1.7 F/O.1 R21.1 | length 2386.3
  Bottom Layer w10: ACS1.7 1475,5245 1440,5280 1330,5280 1280,5230 1280,5170 1240,5130 1120,5130 1055,5065 1055,4705 1085,4675 1180,4675 1570,4285 R21.1 1695,4250 1790,4155 1790,4075 1799,4066 1854,4066 1965,3955 F/O.1
pads on no net: au1.2 au1.4 au1.5 BLUETOOTH1.1 BLUETOOTH1.6 Core1.3 Core1.7 Core1.9 Core1.12 Core1.13 Core1.14 Core1.15 Core1.16 Core1.20 Core1.21 Core1.22 Core1.23 Core1.24 Core1.25 Core1.27 Core1.30 Core1.31 Core1.32 Core1.33 Core1.34 Core1.35 Core1.36 Core1.37 Core1.42 Core1.43 Core1.46 Core1.48 Core1.49 Core1.50 TJA1.5 TPS1.2 TPS1.3 TPS1.5 U1.4

## Polygon pours and split planes (outlines as drawn)
PGND on Bottom Layer (solid, remove dead copper, pour order 142): 630,2520 725,2425 3580,2425 3580,6015 3540,6055 3240,5755 810,5755
GND on Bottom Layer "Bottom Layer-GND" (solid, remove dead copper, pour order 136): 1420,2705 1425,2700 3135,2700 3135,3835 3115,3855 2955,3855 2955,4285 2910,4330 2605,4330 2275,4000 2185,4000 2185,3975 1940,3730 1855,3815 1445,3815
PGND on Top Layer "Top Layer-PGND" (solid, remove dead copper, pour order 140): 795,2515 3245,2515 3345,2615 3345,5735 920,5735 740,5915
GND on Top Layer "Top Layer-GND" (solid, remove dead copper, pour order 138): 1365,2640 3270,2640 3275,2645 3175,2745 3175,3870 2960,3870 2960,4330 2630,4330 2470,4170 2470,4160 2300,3990 2165,3990 2165,3950 2055,3840 2020,3875 1425,3875

## Keep-outs
Keep-Out Layer:
  lines w10: 1030,5155 cw(c1195,5165) 1185,5330 ; 1030,5165 1030,2815 ccw(c1169.72,2855.36) 1165,2710 ; 1145,2710 3015,2710 ; 1175,5330 2990,5330 cw(c2985,5190) 3125,5185 ; 3000,2710 ccw(c2995,2825) 3110,2830 3125,3290 3125,5195

## Other copper
Bottom Layer:
  rectangle net PGND: 1281.43,4850 1435,4920
  rectangle net VI: 1465,4855 1550,4925

## Silkscreen, mask and mechanical layers (free items; w line width, h text height)
Top Overlay:
  text "VIN" at 1255,4930 h30 r270
  text "PGND" at 1250,4740 h30 r270
  text "M+" at 1260,4540 h30 r270
  text "12V" at 3090,4510 h30 r90
  text "M-" at 1285,4460 h30 r270
  text "5V" at 3090,4320 h30 r90
  text "5V" at 1260,4295 h30 r270
  text "A" at 1260,4130 h30 r270
  text "F2" at 2150,4000 h30
  text "M2B" at 2240,4000 h30
  text "M2A" at 2350,4000 h30
  text "DI2" at 2455,4000 h30
  text "S2A" at 2555,4000 h30
  text "S2B" at 2655,4000 h30
  text "B" at 1260,3980 h30 r270
  text "PGND" at 3085,3980 h30 r90
  text "PGND" at 1260,3865 h30 r270
  text "C_H" at 1265,3705 h30 r270
  text "T" at 3090,3640 h30 r90
  text "H" at 1485,3545 h30
  text "R" at 3090,3535 h30 r90
  text "C_L" at 1265,3525 h30 r270
  text "L" at 1485,3440 h30
  text "GND" at 3090,3400 h30 r90
  text "5V" at 3090,3310 h30 r90
  text "Brush_Driver2018SV1.2.3cY" at 1845,2740 h30
Bottom Overlay:
  text "VIN" at 1255,4940 h30 r270
  text "PGND" at 1240,4665 h30 r270
  text "12V" at 3090,4585 h30 r90
  text "M+" at 1240,4570 h30 r270
  text "M-" at 1240,4400 h30 r270
  text "5V" at 3090,4370 h30 r90
  text "A" at 1725,4365 h200
  text "5V" at 1240,4245 h30 r270
  text "A" at 1240,4130 h30 r270
  text "PGND" at 3085,4090 h30 r90
  text "F2" at 2195,4000 h30
  text "M2B" at 2320,4000 h30
  text "M2A" at 2430,4000 h30
  text "DI2" at 2530,4000 h30
  text "S2A" at 2635,4000 h30
  text "S2B" at 2735,4000 h30
  text "B" at 1240,3960 h30 r270
  text "PGND" at 1240,3755 h30 r270
  text "C_H" at 1245,3625 h30 r270
  text "T" at 3090,3620 h30 r90
  text "R" at 3090,3555 h30 r90
  text "H" at 1485,3545 h30
  text "GND" at 3090,3480 h30 r90
  text "C_L" at 1245,3445 h30 r270
  text "L" at 1505,3440 h30
  text "5V" at 3090,3360 h30 r90
  text "Brush_Driver2018SV1.2.3cY" at 2505,2745 h30
Top Solder:
  lines w10: 1210,4430 1210,4435 1205.83,4435 1215.83,4425 ; 1524.37,4585.63 1528.74,4590 ; 2170,4775 2170,4795 ; 2180,4750 2180,4785 ; 2180,4755 2180,4765 ; 1875,4195 1893,4195 1885,4195 1875,4195
  lines w70: 1125,4432.09 1162.91,4435 1205.83,4435 1405.83,4235 ; 1125,4585.63 1524.37,4585.63 ; 1137.28,4892.72 1245,4785 2160,4785 2180,4765 ; 1470,4195 1875,4195 ; 1528.74,4590 1890,4590 1970,4510 ; 1885,4195 1979,4101 1987,4101 ; 2170,4775 2260,4685 ; 2230,4250 2230,4585
  lines w80: 1125,4892.72 1137.28,4892.72 ; 1405.83,4235 1420,4235
Bottom Solder:
  rectangle: 1420,4875 1425,4885
  rectangle: 1370,4875 1425,4925
  rectangle: 1475,4860 1520,4915
  lines w60: 1495,4890 1565,4890
  lines w70: 1565,4890 1770,4685 1770,4290
  lines w80: 1125,4739.17 1139.17,4739.17 1285,4885 1380,4885

## Text inside footprints (layer, text, board x,y; h text height)
Core1: Top Overlay "3V3" at 1565,2815 h30; Top Overlay "P" at 1555,2980 h30; Top Overlay "STM32F103" at 1930,3295 h60